# EAGLE board esq_ordenado (EAGLE 9.5.0)
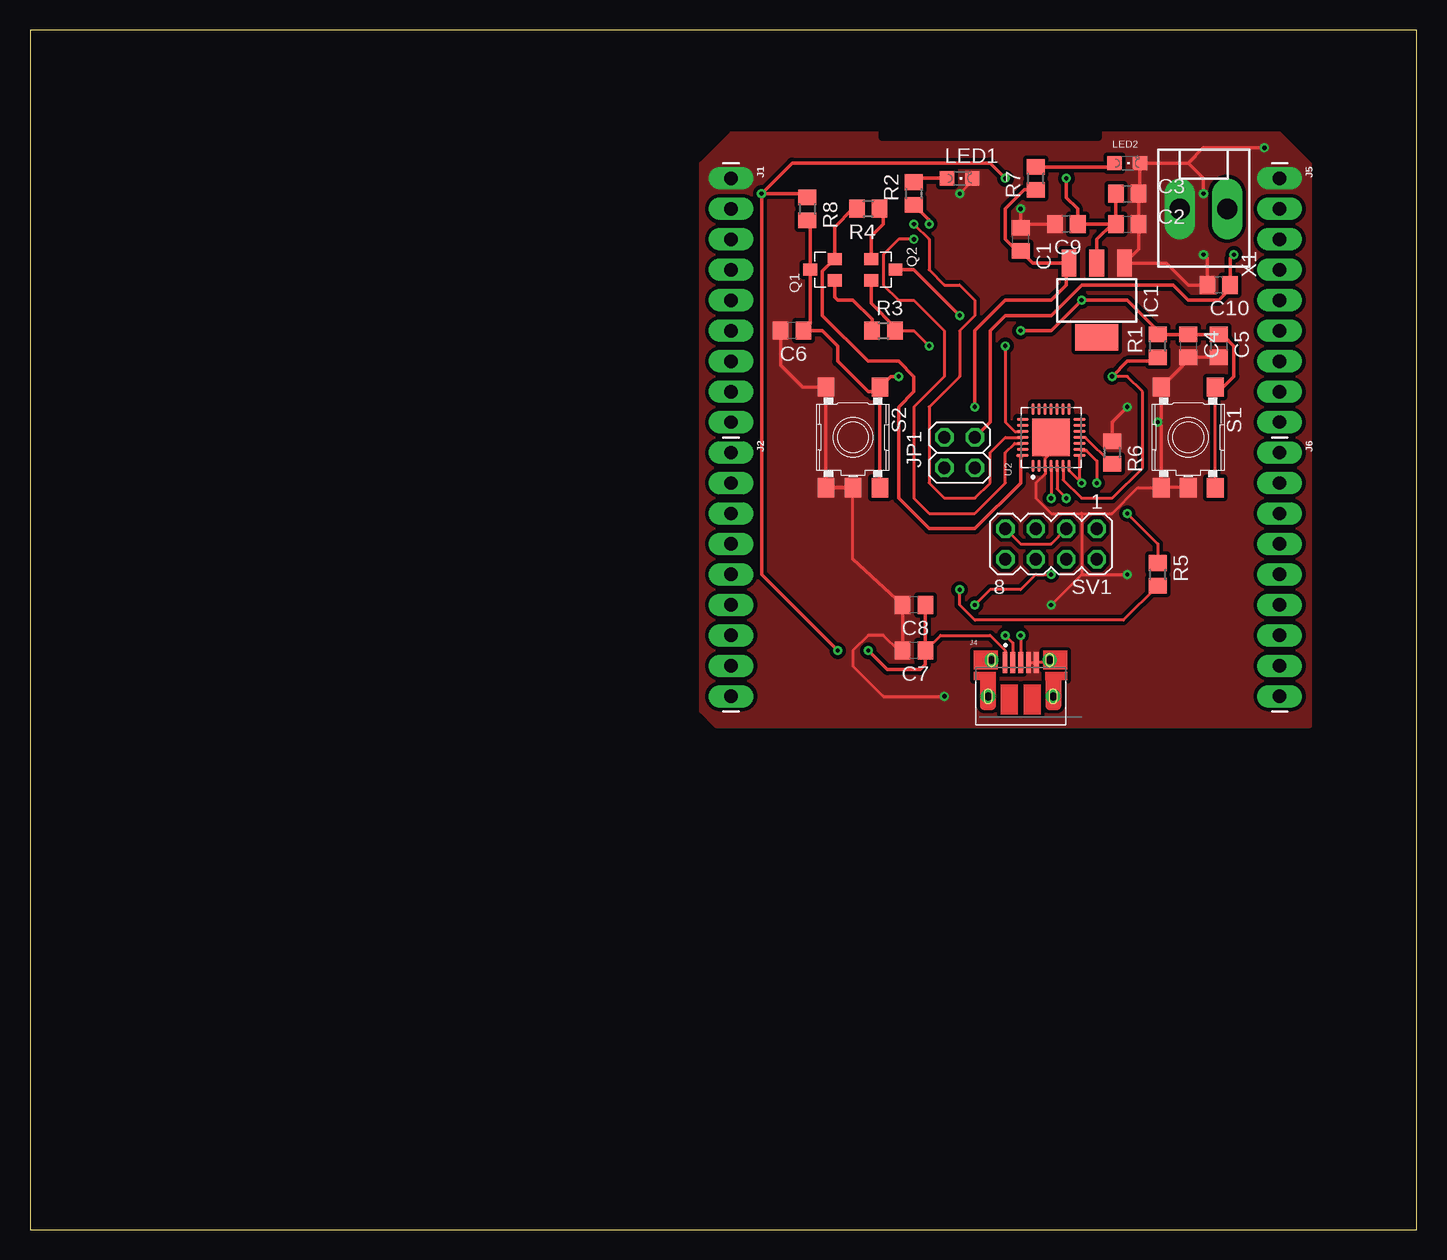
[diagram p0: board, top side]
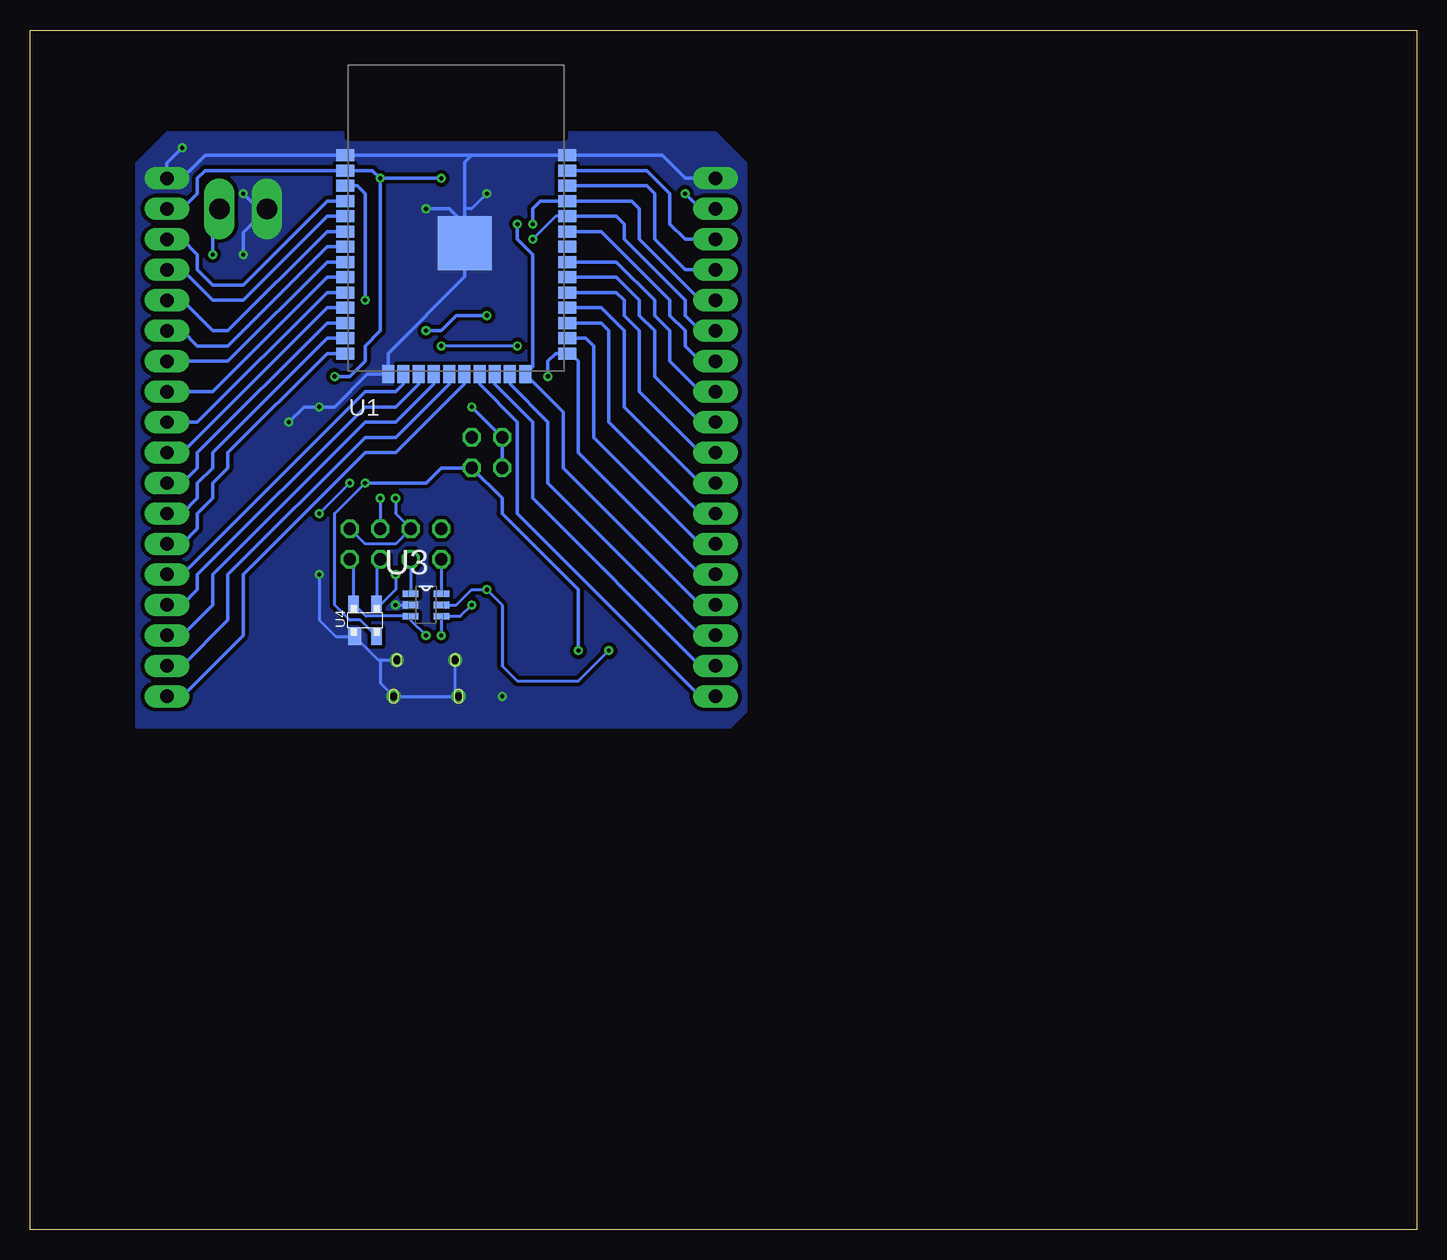
[diagram p1: board, bottom side, seen from below]

Size 115.55 x 100 mm. Coordinates in mm from the lower left corner, seen from the top.
Outline: 0,0 115.55,0 115.55,100 0,100 0,0
Copper layers (1*16): Top 0.035mm / dielectric 1.5mm / Bottom 0.035mm
Design rules "default": minimum track width 6mil, minimum drill 0.35mm, track to track 6mil, track to pad 6mil, pad to pad 6mil, via to via 6mil, smd to smd 6mil, copper to edge 40mil, drill to drill 6mil, minimum pad ring 10mil, minimum via ring 8mil, stop-mask expansion 4mil, vias tented up to drill 0mil, thermal gap 10mil

## Footprints (pad centres in the part's own frame; a part is rotated, then mirrored left to right if it is on the bottom)
C0805 = smd 1.3 x 1.5: 1 -0.95,0; 2 0.95,0
SOT223 = smd 1.219 x 2.235: 1 -2.311,-3.099; 2 0,-3.099; 3 2.311,-3.099 | smd 3.6 x 2.2: TAB 0,3.099
1X09_LONGPADS = drill 1.118 pad 1.88 long: 1 0,0; 2 2.54,0; 3 5.08,0; 4 7.62,0; 5 10.16,0; 6 12.7,0; 7 15.24,0; 8 17.78,0; 9 20.32,0
10103594-0001LF = smd 0.4 x 1.75: 1 -1.3,2.825; 2 -0.65,2.825; 3 0,2.825; 4 0.65,2.825; 5 1.3,2.825 | drill 0.65 pad 1.05: S1 -2.425,3.03; S2 2.425,3.03 | drill 0.66 pad 1.2: S3 -2.705,0; S4 2.705,0
2X02 = drill 1.016 octagon: 1 -1.27,-1.27; 2 -1.27,1.27; 3 1.27,-1.27; 4 1.27,1.27
CHIPLED_0805 = smd 1.2 x 1.2: A 0,-1.05; C 0,1.05
SOT-23 = smd 1.016 x 1.143: 1 -0.889,-1.016; 2 0.889,-1.016; 3 0,1.016
R0805 = smd 1.3 x 1.5: 1 -0.95,0; 2 0.95,0
SKHMPXE010 = smd 1.6 x 1.4: 1 -4.2,2.25; 2 4.2,2.25; 3 -4.2,-2.25; 4 4.2,-2.25; 5 4.2,0
MA04-2 = drill 1.016 octagon: 1 -3.81,-1.27; 2 -3.81,1.27; 3 -1.27,-1.27; 4 -1.27,1.27; 5 1.27,-1.27; 6 1.27,1.27; 7 3.81,-1.27; 8 3.81,1.27
ESP-32S = smd 1.5 x 1: 1 -9.25,7; 2 -9.25,5.73; 3 -9.25,4.46; 4 -9.25,3.19; 5 -9.25,1.92; 6 -9.25,0.65; 7 -9.25,-0.62; 8 -9.25,-1.89; 9 -9.25,-3.16; 10 -9.25,-4.43; 11 -9.25,-5.7; 12 -9.25,-6.97; 13 -9.25,-8.24; 14 -9.25,-9.51; 25 9.25,-9.51; 26 9.25,-8.24; 27 9.25,-6.97; 28 9.25,-5.7; 29 9.25,-4.43; 30 9.25,-3.16; 31 9.25,-1.89; 32 9.25,-0.62; 33 9.25,0.65; 34 9.25,1.92; 35 9.25,3.19; 36 9.25,4.46; 37 9.25,5.73; 38 9.25,7 | smd 1 x 1.5: 15 -5.7,-11.25; 16 -4.43,-11.25; 17 -3.16,-11.25; 18 -1.89,-11.25; 19 -0.62,-11.25; 20 0.65,-11.25; 21 1.92,-11.25; 22 3.19,-11.25; 23 4.46,-11.25; 24 5.73,-11.25 | smd 4.5 x 4.5: GND 0.68,-0.33
QFN50P500X500X100-29N = smd 0.97 x 0.26: 1 -2.37,1.5; 2 -2.37,1; 3 -2.37,0.5; 4 -2.37,0; 5 -2.37,-0.5; 6 -2.37,-1; 7 -2.37,-1.5; 15 2.37,-1.5; 16 2.37,-1; 17 2.37,-0.5; 18 2.37,0; 19 2.37,0.5; 20 2.37,1; 21 2.37,1.5 | smd 0.26 x 0.97: 8 -1.5,-2.37; 9 -1,-2.37; 10 -0.5,-2.37; 11 0,-2.37; 12 0.5,-2.37; 13 1,-2.37; 14 1.5,-2.37; 22 1.5,2.37; 23 1,2.37; 24 0.5,2.37; 25 0,2.37; 26 -0.5,2.37; 27 -1,2.37; 28 -1.5,2.37 | smd 3.15 x 3.15: 29 0,0
SOT95P280X145-6N = smd 1.27 x 0.559: 1 -1.295,0.94; 2 -1.295,0; 3 -1.295,-0.94; 4 1.295,-0.94; 5 1.295,0; 6 1.295,0.94
SOT143 = smd 1.4 x 1.1: 1 -1.35,0.86 | smd 1.4 x 0.9: 2 -1.35,-0.96; 3 1.35,-0.96; 4 1.35,0.96
KK-156-2 = drill 1.7 pad 2.184 long: 1 -1.98,0; 2 1.98,0

## Placement (x,y rotation side)
C1  100uF  [C0805]  82.55,82.55 90 top
C2  0.1uF  [C0805]  91.44,83.82 0 top
C3  4.7uF  [C0805]  91.44,86.36 0 top
C4  0.1uF  [C0805]  96.52,73.66 270 top
C5  1uF  [C0805]  99.06,73.66 270 top
C6  0.1uF  [C0805]  63.5,74.93 180 top
C7  0.1uF  [C0805]  73.66,48.26 180 top
C8  1.0uF  [C0805]  73.66,52.07 180 top
C9  10uF  [C0805]  86.36,83.82 180 top
C10  10uF  [C0805]  99.06,78.74 180 top
IC1  LM1117IMPX-3.3  [SOT223]  88.9,77.47 180 top
J1  [1X09_LONGPADS]  58.42,87.63 270 top
J2  [1X09_LONGPADS]  58.42,64.77 270 top
J4  10103594-0001LF  [10103594-0001LF]  82.55,44.45 0 top
J5  [1X09_LONGPADS]  104.14,87.63 270 top
J6  [1X09_LONGPADS]  104.14,64.77 270 top
JP1  [2X02]  77.47,64.77 90 top
LED1  [CHIPLED_0805]  77.47,87.63 270 top
LED2  [CHIPLED_0805]  91.44,88.9 270 top
Q1  SMD-TRANSISTORS-NPN-25V-500MW(SOT-23)  [SOT-23]  66.04,80.01 90 top
Q2  SMD-TRANSISTORS-NPN-25V-500MW(SOT-23)  [SOT-23]  71.12,80.01 270 top
R1  10K  [R0805]  93.98,73.66 90 top
R2  10K  [R0805]  73.66,86.36 90 top
R3  12K  [R0805]  71.12,74.93 0 top
R4  12K  [R0805]  69.85,85.09 180 top
R5  4.7K  [R0805]  93.98,54.61 90 top
R6  10K  [R0805]  90.17,64.77 270 top
R7  10K  [R0805]  83.82,87.63 90 top
R8  10K  [R0805]  64.77,85.09 270 top
S1  SKHMPSE010  [SKHMPXE010]  96.52,66.04 270 top
S2  SKHMPSE010  [SKHMPXE010]  68.58,66.04 270 top
SV1  [MA04-2]  85.09,57.15 180 top
U1  ESP-32S  [ESP-32S]  80.01,82.55 0 bottom
U2  CP2102-GM  [QFN50P500X500X100-29N]  85.09,66.04 90 top
U3  TPD2S017DBVR  [SOT95P280X145-6N]  82.55,52.07 0 bottom
U4  SP0503BAHT  [SOT143]  87.63,50.8 90 bottom
X1  [KK-156-2]  97.79,85.09 0 top

## Library data of the parts
C1-C10 R1-R8 = resistor
IC1 = lm1117
J1 J2 J5 J6 = SparkFun-Connectors
J4 = Connectors_1; CREATED_BY: PCBLayout.com; DIGIKEY_PART_NUMBER: 609-4050-2-ND; MANUFACTURER: Amphenol ICC (FCI); MPN: 10103594-0001LF
JP1 = pinhead
LED1 LED2 = adafruit
Q1 Q2 = SMD-TRANSISTORS-NPN-25V-500MW_SOT-23_; AVAILABILITY: Unavailable; MF: Recom Power; MP: S8050; PACKAGE: SOT-23 Micro Commercial; PRICE: None
S1 S2 = switch
SV1 = con-lstb; OC_FARNELL: unknown; OC_NEWARK: unknown
U1 = esp32
U2 = CP2102-GM; AVAILABILITY: Unavailable; DESCRIPTION: Microcontroller Solutions - Interface Products USB to UART Bdg Chip; MF: Silicon Labs; MP: CP2102-GM; PACKAGE: QFN-28 Silicon Labs; PRICE: None
U3 = TPD2S017DBVR; DESCRIPTION: 2-Channel Ultra Low Clamp Voltage ESD Solution with Series-Resistor Isolation 6-SOT-23 -40 to 85; DIGI-KEY_PART_NUMBER: 296-25216-1-ND; DIGI-KEY_PURCHASE_URL: https://www.digikey.com/product-detail/en/texas-instruments/TPD2S017DBVR/296-25216-1-ND/2172703?utm_source=snapeda&utm_medium=aggregator&utm_campaign=symbol; MF: Texas Instruments; MP: TPD2S017DBVR; PACKAGE: SOT-23-6 Texas Instruments
U4 = SP0503BAHT; AVAILABILITY: Unavailable; DESCRIPTION: Tvs Diode 5.5vwm 8.5vc Sot143; MF: Littelfuse Inc.; MP: SP0503BAHT; PACKAGE: SOT-143 Littelfuse; PRICE: None
X1 = con-molex; MF: MOLEX; OC_FARNELL: unknown; OC_NEWARK: unknown

## Nets
3.3V: C2.1 C3.1 C9.1 IC1.2 J1.2 J5.2 R1.1 R5.1 R8.1 U1.2 U2.6 U3.5
CLK [PINES_ESP]: J6.9 U1.20
CMD [PINES_ESP]: J6.8 U1.19
D+: SV1.1 SV1.5 U2.4
D+_OUT: J4.3 SV1.2 U3.3 U4.4
D+IN: SV1.6 U3.1
D-: SV1.3 SV1.7 U2.5
D-_OUT: J4.2 SV1.4 U3.4 U4.3
D-IN: SV1.8 U3.6
DTR_CP: Q1.2 R4.2 U2.28
ENABLE [PINES_ESP]: C4.1 C5.1 Q2.3 R1.2 S1.1 S1.2 U1.3
GND: C1.2 C2.2 C3.2 C4.2 C5.2 C6.2 C7.2 C8.2 C9.2 C10.2 IC1.1 J1.1 J4.4 J4.5 J4.S1 J4.S2 J4.S3 J4.S4 J5.1 LED1.C LED2.C R6.1 S1.3 S1.4 S1.5 S2.3 S2.4 S2.5 U1.1 U1.15 U1.38 U1.GND U2.3 U2.29 U3.2 U4.1 X1.1
IO0 [PINES_ESP]: C6.1 J2.5 Q1.3 R8.2 S2.1 S2.2 U1.25
IO2 [PINES_ESP]: J2.6 R2.1 U1.24
IO4 [PINES_ESP]: J2.4 U1.26
IO5 [PINES_ESP]: J2.1 U1.29
IO12 [PINES_ESP]: J6.4 U1.14
IO13 [PINES_ESP]: J6.5 U1.16
IO14 [PINES_ESP]: J6.3 U1.13
IO15 [PINES_ESP]: J2.7 U1.23
IO16 [PINES_ESP]: J2.3 U1.27
IO17 [PINES_ESP]: J2.2 U1.28
IO18 [PINES_ESP]: J1.9 U1.30
IO19 [PINES_ESP]: J1.8 U1.31
IO21 [PINES_ESP]: J1.7 U1.33
IO22 [PINES_ESP]: J1.4 U1.36
IO23 [PINES_ESP]: J1.3 U1.37
IO25 [PINES_ESP]: J5.9 U1.10
IO26 [PINES_ESP]: J6.1 U1.11
IO27 [PINES_ESP]: J6.2 U1.12
IO32 [PINES_ESP]: J5.7 U1.8
IO33 [PINES_ESP]: J5.8 U1.9
IO34 [PINES_ESP]: J5.5 U1.6
IO35 [PINES_ESP]: J5.6 U1.7
N$2: LED1.A R2.2
N$3: Q1.1 R3.1
N$4: Q2.1 R4.1
N$5: R5.2 U2.9
N$6: LED2.A R7.2
RTS_CP: Q2.2 R3.2 U2.24
RXD_ESP [PINES_ESP]: J1.6 U1.34 U2.26
SD0 [PINES_ESP]: J2.9 U1.21
SD1 [PINES_ESP]: J2.8 U1.22
SD2 [PINES_ESP]: J6.6 U1.17
SD3 [PINES_ESP]: J6.7 U1.18
SUSPEND-: R6.2 U2.11
SVN [PINES_ESP]: J5.4 U1.5
SVP [PINES_ESP]: J5.3 U1.4
TXD_ESP [PINES_ESP]: J1.5 U1.35 U2.25
VCC: C10.1 JP1.3 X1.2
VIN: C1.1 IC1.3 JP1.2 JP1.4 R7.1
VUSB: C7.1 C8.1 J4.1 JP1.1 U2.7 U2.8 U4.2

## Tracks (layer width: path | path; a pad name or v marks a point on that pad's centre or on a via)
3.3V  (via drill 0.35)
  Top 0.254: U2.6 86.09,62.5 87.63,60.96 90.17,60.96 92.71,63.5 92.71,69.85 91.44,71.12 v90.17,71.12 | R5.1 91.12,50.8 78.74,50.8 77.47,52.07 v77.47,53.34
  Top 0.305: C3.1 C2.1 | IC1.2 88.9,82.55 90.17,83.82 C2.1 | C2.1 C9.1 87.31,85.09 86.36,86.04 v86.36,87.63 | v60.96,86.36 63.5,88.9 80.01,88.9 v81.28,87.63 | R1.1 93.66,72.39 91.44,72.39 v90.17,71.12 | 64.45,86.36 R8.1 65.09,86.04 64.77,86.36 v60.96,86.36 | v67.31,48.26 60.96,54.61 v60.96,86.36
  Bottom 0.254: U3.5 80.01,52.07 78.74,53.34 v77.47,53.34 76.2,52.07 76.2,46.99 74.93,45.72 69.85,45.72 v67.31,48.26
  Bottom 0.305: U1.2 89.52,88.28 | U1.2 100.95,88.28 101.6,87.63 101.6,86.36 102.87,85.09 J5.2 | v86.36,87.63 87.01,88.28 U1.2 | J1.2 59.69,85.09 v60.96,86.36 | v81.28,87.63 v86.36,87.63 | v86.36,87.63 86.36,74.93 87.63,73.66 87.63,72.39 88.9,71.12 v90.17,71.12
CLK
  Bottom 0.305: U1.20 79.36,70.5 85.09,64.77 87.63,64.77 97.79,54.61 97.79,49.53 102.87,44.45 J6.9
CMD
  Bottom 0.305: U1.19 80.63,70.5 85.09,66.04 87.63,66.04 99.06,54.61 99.06,50.8 102.87,46.99 J6.8
D+  (via drill 0.35)
  Top 0.254: U2.4 v85.09,60.96
  Bottom 0.254: v85.09,60.96 85.09,59.69 SV1.5 85.09,57.15 87.63,57.15 SV1.1
D+_OUT  (via drill 0.35)
  Top 0.254: v82.55,49.53 J4.3
  Bottom 0.254: U4.4 88.59,55.57 SV1.2 | 88.59,51.95 U4.4 | U4.4 87.57,51.13 U3.3 83.84,50.83 v82.55,49.53
D+IN
  Bottom 0.254: SV1.6 83.82,53.03 U3.1
D-  (via drill 0.35)
  Top 0.254: U2.5 85.59,61.73 v86.36,60.96 | SV1.7 82.55,57.15 85.09,57.15 SV1.3
  Bottom 0.254: v86.36,60.96 SV1.3
D-_OUT  (via drill 0.35)
  Top 0.254: v81.28,49.53 81.9,48.91 J4.2 | v78.74,52.07 80.01,53.34 82.55,53.34 83.82,54.61 v85.09,54.61
  Bottom 0.254: SV1.4 86.67,55.57 U4.3 86.28,52.15 85.09,53.34 v85.09,54.61 | v81.28,49.53 81.28,51.1 U3.4 79.68,51.13 v78.74,52.07
D-IN
  Bottom 0.254: SV1.8 81.28,53.03 U3.6
DTR_CP
  Top 0.305: 68.58,85.41 R4.2 68.58,85.09 67.06,83.57 Q1.2 66.04,79.88 66.04,76.2 69.85,72.39 72.39,72.39 73.66,71.12 73.66,69.85 72.39,68.58 72.39,60.96 74.93,58.42 78.74,58.42 82.55,62.23 82.55,64.54 | 82.32,64.54 82.55,64.54 | 82.55,64.54 U2.28
ENABLE  (via drill 0.35)
  Top 0.254: S1.2 S1.1
  Top 0.305: 98.77,70.83 S1.1 99.45,70.24 100.33,71.12 100.33,73.66 99.38,74.61 C5.1 C4.1 R1.2 93.98,74.93 91.44,77.47 v87.63,77.47 85.09,74.93 v82.55,74.93 | Q2.3 73.66,80.01 v77.47,76.2
  Bottom 0.305: U1.3 88.28,87.01 87.63,86.36 v87.63,77.47 | v77.47,76.2 80.01,76.2 81.28,74.93 v82.55,74.93
GND  (via drill 0.35)
  Top 0.254: U2.29 85.09,64.77 84.59,64.27 U2.3 84.59,63 83.82,62.23 83.82,60.96 85.09,59.69 87.63,59.69 | S1.5 S1.4 92.32,61.84 90.17,59.69 87.63,59.69 | 68.58,55.88 S2.5 | LED1.C 78.52,87.41 v77.47,86.36 | 87.63,59.69 87.63,54.61 | v85.09,52.07 87.63,54.61 | J4.4 J4.5 84.77,47.27 J4.S2 | 87.63,54.61 v91.44,54.61 | C7.2 72.39,48.26 71.12,49.53 69.85,49.53 68.58,48.26 68.58,46.99 71.12,44.45 v76.2,44.45
  Top 0.305: v97.79,81.28 98.11,80.96 C10.2 96.52,78.74 94.69,80.57 IC1.1 92.39,81.75 C2.2 C3.2 92.49,86.46 LED2.C 96.52,88.9 | C9.2 82.87,83.82 C1.2 v82.55,85.09 | C5.2 C4.2 96.52,72.49 S1.3 | 94.66,69.85 S1.3 | S2.5 S2.4 S2.3 64.38,70.24 62.55,72.07 C6.2 | 96.52,88.9 97.79,87.63 v97.79,86.36 | 96.52,88.9 97.79,90.17 v102.87,90.17 | S1.3 94.27,67.6 v93.98,67.31 94.27,67.02 S1.4 | v91.44,68.58 90.17,67.31 R6.1 | 68.58,55.88 C8.2 C7.2
  Bottom 0.254: v85.09,52.07 U3.2 | U1.GND 79.33,82.55 | v77.47,86.36 78.74,85.09 79.33,85.09 | 86.36,47.48 86.52,47.48 U4.1 90.09,49.45 91.44,50.8 v91.44,54.61 | 86.36,47.48 J4.S2 | 86.36,47.48 86.36,45.55 J4.S4 J4.S3 80.12,44.73 J4.S1
  Bottom 0.305: J1.1 60.96,87.63 62.88,89.55 U1.38 78.74,89.55 | v97.79,81.28 97.79,83.11 X1.1 96.52,85.09 v97.79,86.36 | 78.74,89.55 U1.1 100.95,89.55 102.87,87.63 J5.1 104.14,88.9 v102.87,90.17 | 79.33,82.55 79.33,83.82 | 79.33,83.82 79.33,85.09 79.33,88.96 78.74,89.55 | U1.GND 79.33,79.42 85.71,73.04 U1.15 87.45,71.3 90.17,68.58 v91.44,68.58 92.71,68.58 v93.98,67.31 | 79.33,83.82 80.6,85.09 v82.55,85.09
  pour Bottom (isolate 0.305, no thermals): 58.42,91.44 104.14,91.44 106.68,88.9 106.68,41.91 57.15,41.91 55.88,43.18 55.88,88.9
  pour Top (isolate 0.305, no thermals): 55.88,88.9 58.42,91.44 104.14,91.44 106.68,88.9 106.68,41.91 57.15,41.91 55.88,43.18
IO0  (via drill 0.35)
  Top 0.305: S2.1 71.71,71.12 v72.39,71.12 | S2.1 S2.2 | R8.2 65.02,83.89 Q1.3 65.02,75.5 C6.1 66.04,74.93 67.31,73.66 67.31,72.39 69.85,69.85 70.44,69.85 S2.1
  Bottom 0.305: J2.5 59.69,54.61 69.85,64.77 69.85,72.39 70.5,73.04 U1.25 71.74,73.04 72.39,72.39 v72.39,71.12
IO2  (via drill 0.35)
  Top 0.305: R2.1 74.93,84.14 v74.93,83.82
  Bottom 0.305: J2.6 59.69,52.07 71.12,63.5 71.12,68.14 U1.24 73.66,71.92 73.66,81.28 74.93,82.55 v74.93,83.82
IO4
  Bottom 0.305: U1.26 69.23,74.31 68.58,73.66 68.58,66.04 59.69,57.15 J2.4
IO5
  Bottom 0.305: U1.29 66.69,78.12 66.04,77.47 66.04,76.2 64.77,74.93 64.77,69.85 59.69,64.77 J2.1
IO12
  Bottom 0.305: U1.14 90.79,73.04 99.06,64.77 99.06,63.5 100.33,62.23 100.33,60.96 101.6,59.69 101.6,58.42 102.87,57.15 J6.4
IO13
  Bottom 0.305: U1.16 84.44,70.5 85.09,69.85 87.63,69.85 102.87,54.61 J6.5
IO14
  Bottom 0.305: U1.13 90.79,74.31 100.33,64.77 100.33,63.5 101.6,62.23 101.6,60.96 102.87,59.69 J6.3
  Bottom 0.508: U1.13 89.52,74.31
IO15
  Bottom 0.305: U1.23 75.55,70.47 72.39,67.31 72.39,62.23 59.69,49.53 J2.7
IO16
  Bottom 0.305: U1.27 67.96,75.58 67.31,74.93 67.31,67.31 59.69,59.69 J2.3
IO17
  Bottom 0.305: U1.28 67.96,76.85 66.04,74.93 66.04,68.58 59.69,62.23 J2.2
IO18
  Bottom 0.305: U1.30 66.69,79.39 64.77,77.47 64.77,76.2 63.5,74.93 63.5,71.12 59.69,67.31 J1.9
IO19
  Bottom 0.305: U1.31 66.69,80.66 63.5,77.47 63.5,76.2 62.23,74.93 62.23,72.39 59.69,69.85 J1.8
IO21
  Bottom 0.305: U1.33 67.96,83.2 62.23,77.47 62.23,76.2 60.96,74.93 60.96,73.66 59.69,72.39 J1.7
IO22
  Bottom 0.305: U1.36 64.15,87.01 63.5,86.36 63.5,82.55 60.96,80.01 J1.4
IO23
  Bottom 0.305: U1.37 64.15,88.28 62.23,86.36 62.23,83.82 60.96,82.55 J1.3
IO25
  Bottom 0.305: U1.10 90.17,78.12 90.79,78.12 101.6,67.31 J5.9
  Bottom 0.508: U1.10 89.52,78.12
IO26
  Bottom 0.305: U1.11 90.79,76.85 102.87,64.77 J6.1
  Bottom 0.508: U1.11 89.52,76.85
IO27
  Bottom 0.305: U1.12 90.79,75.58 101.6,64.77 101.6,63.5 102.87,62.23 J6.2
  Bottom 0.508: U1.12 89.52,75.58
IO32
  Bottom 0.305: U1.8 90.79,80.66 99.06,72.39 J5.7
IO33
  Bottom 0.305: U1.9 90.79,79.39 100.33,69.85 J5.8
  Bottom 0.508: U1.9 89.52,79.39
IO34
  Bottom 0.305: U1.6 90.79,83.2 99.06,74.93 100.33,74.93 102.87,77.47 J5.5
IO35
  Bottom 0.305: U1.7 90.79,81.93 99.06,73.66 101.6,73.66 102.87,74.93 J5.6
N$2
  Top 0.305: R2.2 73.98,87.63 LED1.A
N$3
  Top 0.305: Q1.1 67.06,77.72 67.31,77.47 68.58,77.47 70.17,75.88 R3.1
N$4
  Top 0.305: Q2.1 70.1,82.8 71.12,83.82 71.12,84.77 R4.1
N$5  (via drill 0.35)
  Top 0.254: U2.9 87.55,64.95 88.02,64.95 88.9,64.07 v88.9,62.23 | v91.44,59.69 93.98,57.15 R5.2
  Bottom 0.254: v88.9,62.23 v91.44,59.69
N$6
  Top 0.305: LED2.A 90.07,88.58 R7.2
RTS_CP  (via drill 0.35)
  Top 0.254: R3.2 73.66,74.93 v74.93,73.66 | v81.28,73.66 81.28,67.31 82.05,66.54 U2.24
  Top 0.305: Q2.2 70.1,77.22 72.07,75.25 R3.2
  Bottom 0.254: v74.93,73.66 v81.28,73.66
RXD_ESP  (via drill 0.35)
  Top 0.254: v73.66,82.55 72.39,82.55 71.12,81.28 71.12,78.74 72.39,77.47 73.66,77.47 76.2,74.93 76.2,71.12 73.66,68.58 73.66,60.96 74.93,59.69 78.74,59.69 81.28,62.23 81.28,64.77 82.05,65.54 U2.26
  Bottom 0.254: U1.34 71.74,84.47 v73.66,82.55
  Bottom 0.305: U1.34 66.69,84.47 66.04,83.82 66.04,82.55 60.96,77.47 60.96,76.2 59.69,74.93 J1.6
SD0
  Bottom 0.305: U1.21 78.09,70.47 74.93,67.31 74.93,59.69 59.69,44.45 J2.9
SD1
  Bottom 0.305: U1.22 76.82,70.47 73.66,67.31 73.66,60.96 59.69,46.99 J2.8
SD2
  Bottom 0.305: U1.17 83.17,70.5 85.09,68.58 87.63,68.58 101.6,54.61 101.6,53.34 102.87,52.07 J6.6
SD3
  Bottom 0.305: U1.18 81.9,70.5 85.09,67.31 87.63,67.31 100.33,54.61 100.33,52.07 102.87,49.53 J6.7
SUSPEND-
  Top 0.254: R6.2 87.95,66.04 U2.11
SVN
  Bottom 0.305: U1.5 90.79,84.47 97.79,77.47 100.33,77.47 102.87,80.01 J5.4
SVP
  Bottom 0.305: U1.4 90.79,85.74 97.79,78.74 100.33,78.74 101.6,80.01 101.6,81.28 102.87,82.55 J5.3
TXD_ESP  (via drill 0.35)
  Top 0.254: v73.66,83.82 74.93,82.55 74.93,80.01 76.2,78.74 77.47,78.74 78.74,77.47 78.74,76.2 77.47,74.93 77.47,71.12 74.93,68.58 74.93,62.23 76.2,60.96 78.74,60.96 80.01,62.23 80.01,64.77 81.28,66.04 U2.25
  Bottom 0.305: J1.5 59.69,77.47 64.77,82.55 64.77,85.09 65.42,85.74 U1.35 73.01,85.74 73.66,85.09 v73.66,83.82
VCC  (via drill 0.35)
  Top 0.305: v100.33,81.28 100.01,80.96 C10.1 100.01,78.42 99.06,77.47 96.52,77.47 95.25,78.74 87.63,78.74 85.09,76.2 81.28,76.2 80.01,74.93 80.01,67.31 JP1.3
  Bottom 0.305: v100.33,81.28 100.33,84.53 X1.2
VIN  (via drill 0.35)
  Top 0.305: IC1.3 86.2,80.96 | IC1.3 86.36,80.34 86.36,78.74 85.09,77.47 81.28,77.47 78.74,74.93 v78.74,68.58 | R7.1 82.87,86.68 81.28,85.09 81.28,82.55 82.23,81.6 C1.1 83.58,80.57 IC1.3
  Bottom 0.305: JP1.2 JP1.4 v78.74,68.58
VUSB  (via drill 0.35)
  Top 0.254: v87.63,62.23 86.59,63.27 U2.7 | 87.46,62.4 U2.8 | C7.1 75.88,49.53 80.01,49.53 81.28,48.26 81.28,47.3 J4.1
  Top 0.305: 87.46,62.4 v87.63,62.23 | C8.1 C7.1 74.61,47.1 74.18,46.67 71.44,46.67 v69.85,48.26
  Bottom 0.254: U4.2 88.02,50.8 88.9,50.8 90.17,52.07 90.17,59.69 v87.63,62.23
  Bottom 0.305: v87.63,62.23 82.55,62.23 81.28,63.5 JP1.1 76.2,60.96 76.2,59.69 69.85,53.34 v69.85,48.26